# Altium PCB PCB_FVT_TESTER.PcbDoc
Units mil, origin at the board's own origin, x right, y up, seen from the top; angles counter-clockwise.
Board outline 4250 x 2500 mil, 2 copper layers (Top Layer, Bottom Layer); 45 components, 28 nets, 145 pads, 0 vias.
Unrouted connection lines stored in the file: 16.
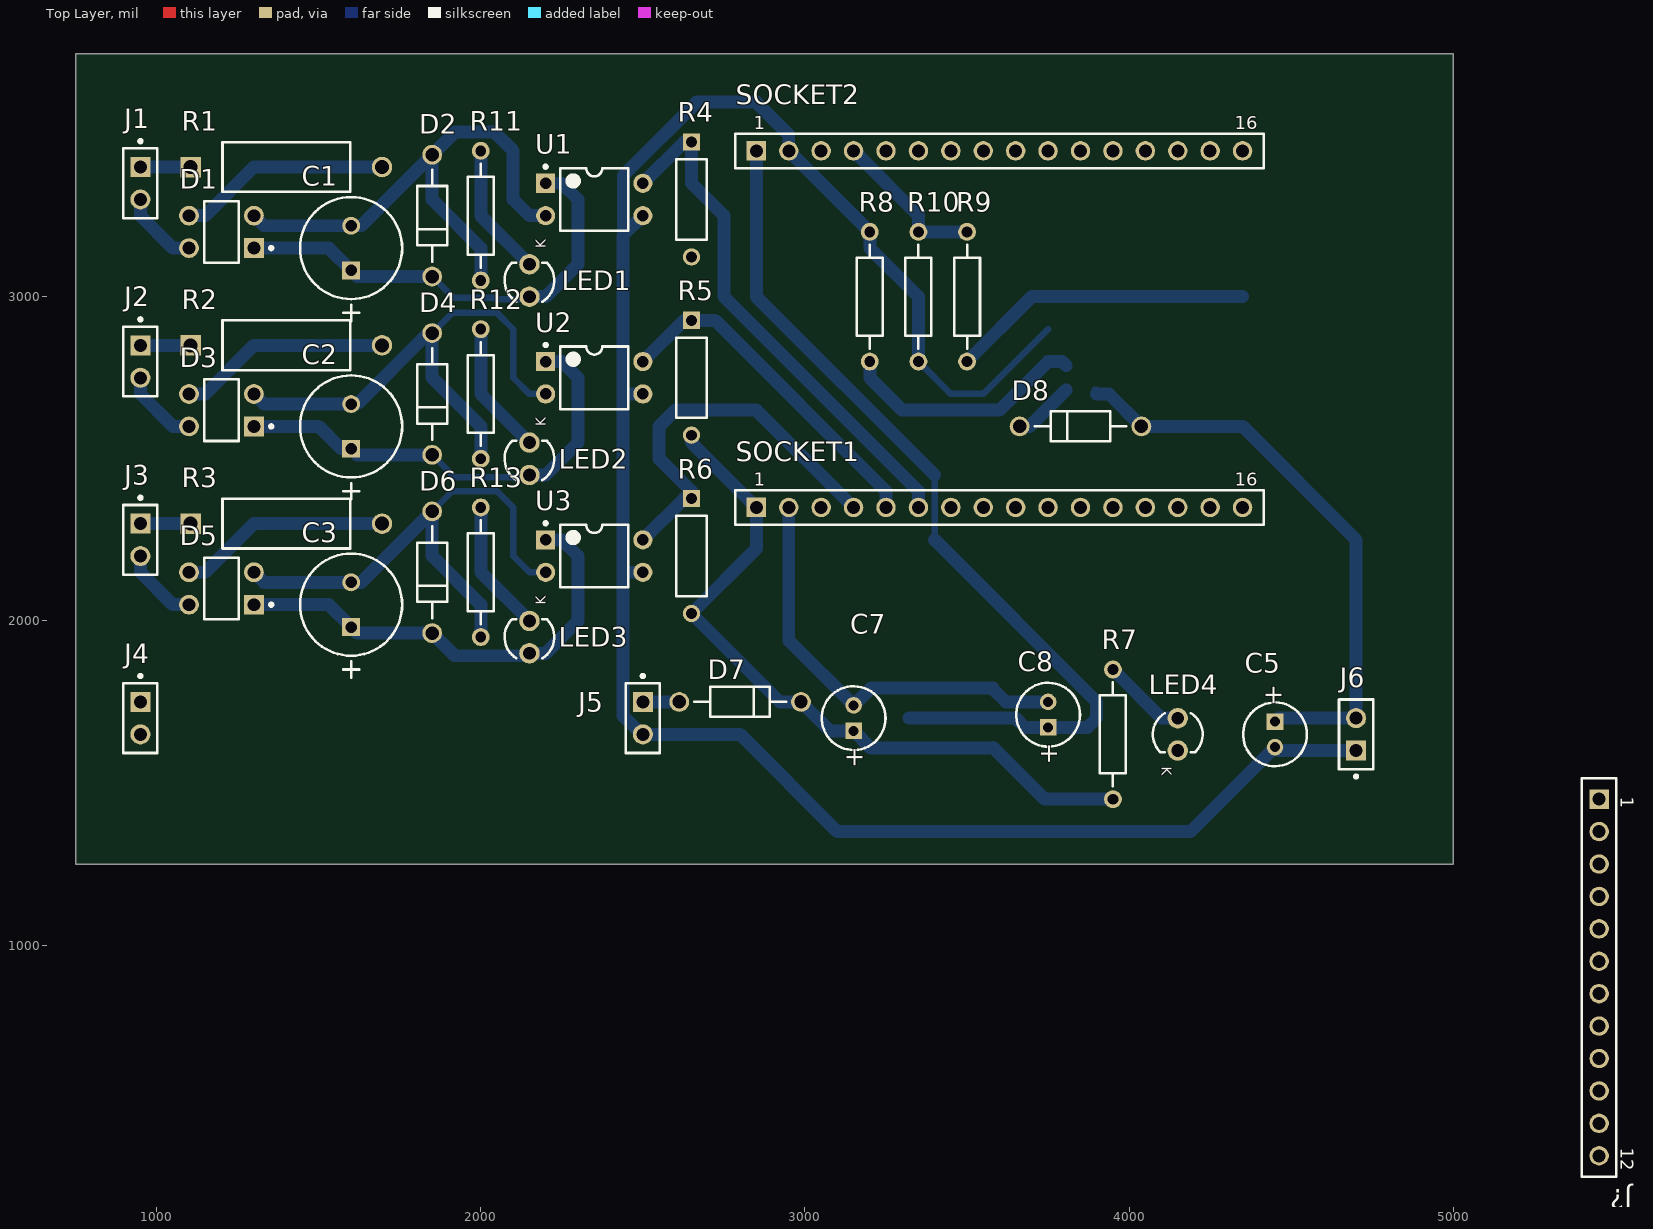
[diagram p0: Top Layer view]
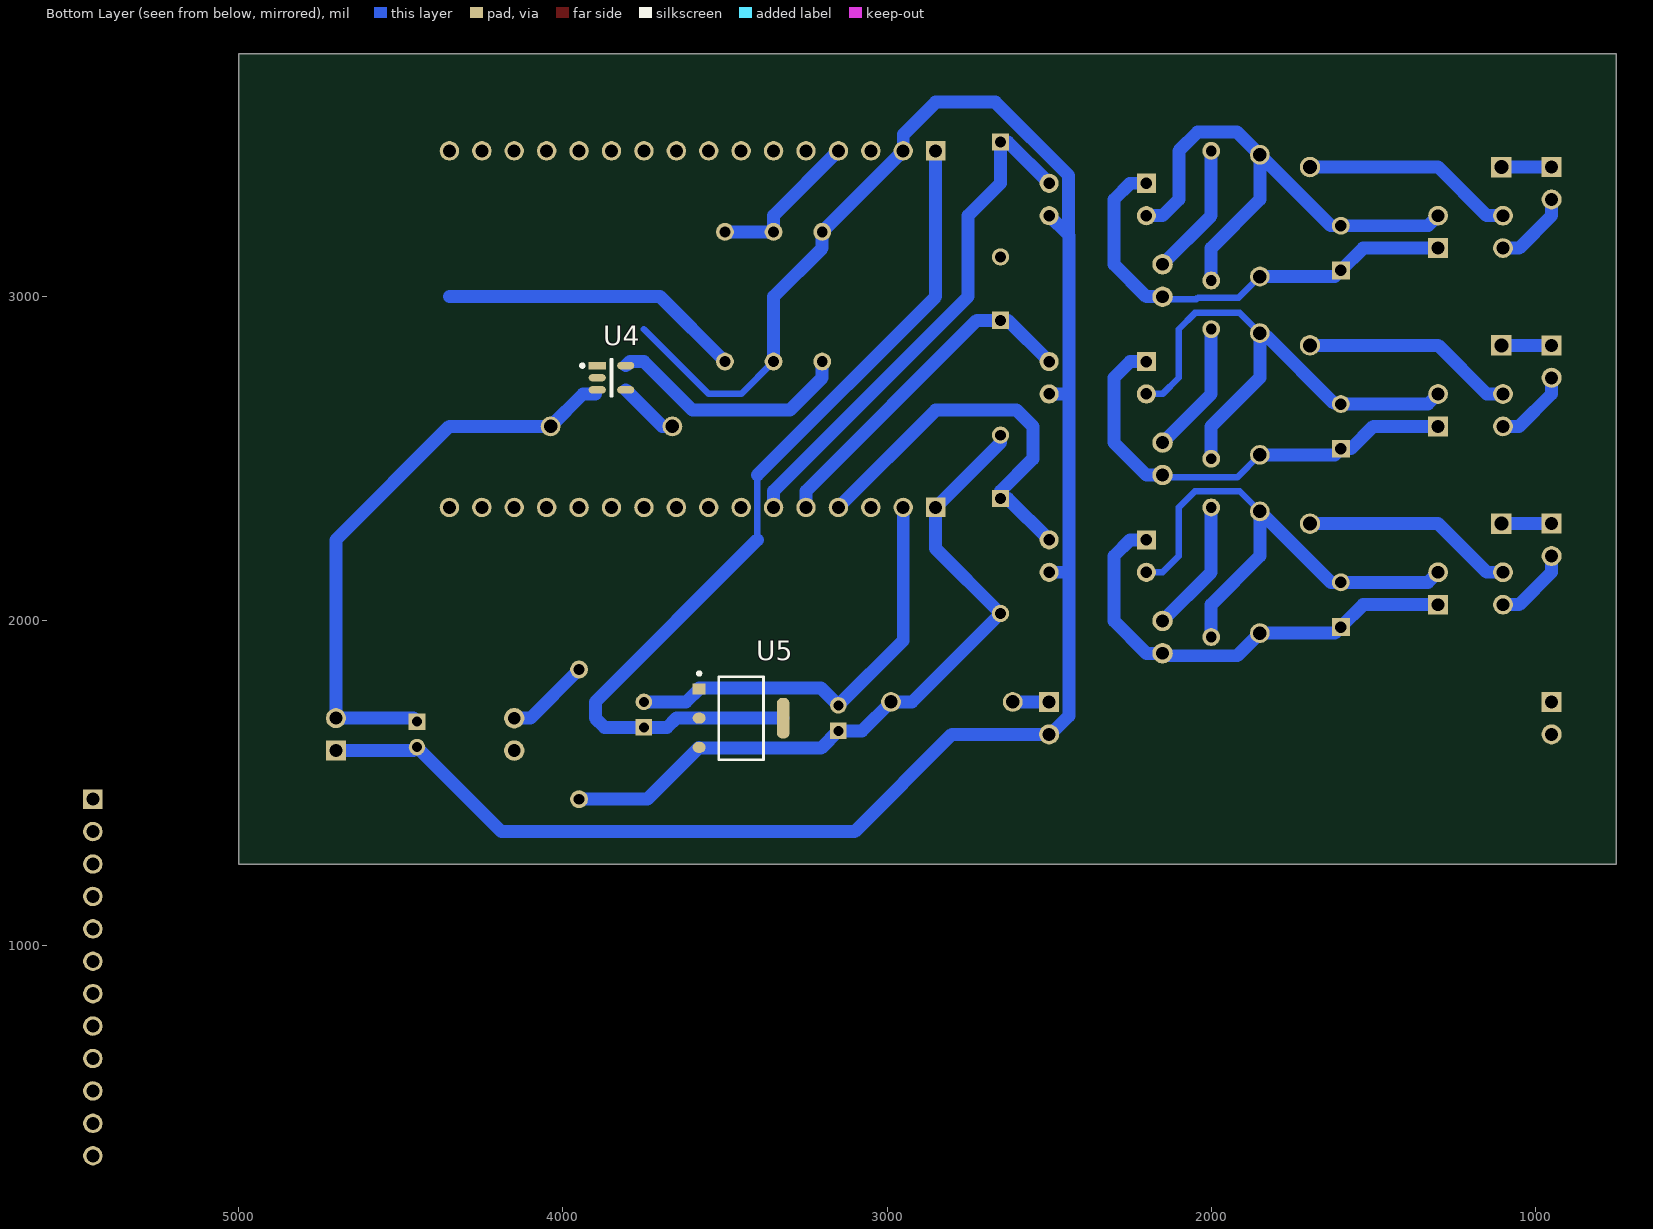
[diagram p1: Bottom Layer view, seen from below]

## Layer stack, top to bottom
Top Solder: solder mask 0.4, Solder Resist, Dk 3.5
Top Layer: signal copper 1.4
Dielectric 1: dielectric 12.6, FR-4, Dk 4.8
Bottom Layer: signal copper 1.4
Bottom Solder: solder mask 0.4, Solder Resist, Dk 3.5

## Board outline
750,1250 750,3750 5000,3750 5000,1250

## Design rules (kind name [scope] priority, off if disabled: settings)
Clearance [All] p1: gap=10 ignorepadtopadclearanceinfootprint=FALSE except(0: Arc-Hole Track-Hole SMDPad-Hole THPad-Hole Via-Hole Fill-Hole Poly-Hole Region-Hole Text-Hole)
PolygonConnect [All] p1: connectstyle=Relief reliefconductorwidth=10 reliefentries=4 polygonreliefangle="90 Angle" airgapwidth=10
RoutingVias [All] p1: holewidth=28 width=50 viastyle="Through Hole" minholewidth=28 minwidth=50 maxholewidth=28 maxwidth=50
SolderMaskExpansion [All] p1: expansion=4 istentingtop=FALSE
Width [All] p1: maxlimit=50 minlimit=10 preferedwidth=40 toplayer_maxwidth=10 toplayer_prefwidth=10 bottomlayer_minwidth=20 minimp=50.000000 maximp=50.000000 favimp=50.000000
30 further rules are at their usual default settings.

## Classes and differential pairs
component class soqueteESP32: J? SOCKET1 SOCKET2
component class "Modulo de isolação AC": C1 C2 C3 D1 D2 D3 D4 D5 D6 J1 J2 J3 J4 LED1 LED2 LED3 R1 R2 R3 R4 R5 R6 R11 R12 R13 U1 U2 U3
component class AdaptadorBateria: C5 C7 C8 D7 D8 J5 J6 LED4 R7 R8 R9 R10 U4 U5

## Components (designator, comment, footprint, x,y, rotation, side; value= is the part's Value field where it differs from the comment)
C1 "ECA1HM101" CAPPR65-350-1150X800X1250 1600,3150 r90 top
C2 "ECA1HM101" CAPPR65-350-1150X800X1250 1600,2600 r90 top
C3 "ECA1HM101" CAPPR65-350-1150X800X1250 1600,2050 r90 top
C5 "ECA1HM220" CAPPR55-200-1100X500X1200 4450,1650 r270 top
C7 "ECA1HM220" CAPPR55-200-1100X500X1200 3150,1700 r90 top
C8 "ECA1HM220" CAPPR55-200-1100X500X1200 3750,1710.63 r90 top
D1 "MB6M-E3/45" FP-MB6M-E3-45-MFG 1200,3200 r180 top
D2 "1N5919BG" ONSC-AXIAL_LEAD-2-59-10_P 1850,3250 r90 top
D3 "MB6M-E3/45" FP-MB6M-E3-45-MFG 1200,2650 r180 top
D4 "1N5919BG" ONSC-AXIAL_LEAD-2-59-10_P 1850,2700 r90 top
D5 "MB6M-E3/45" FP-MB6M-E3-45-MFG 1200,2100 r180 top
D6 "1N5919BG" ONSC-AXIAL_LEAD-2-59-10_P 1850,2150 r90 top
D7 "1N5819RLG" ONSC-AXIAL_LEAD-2-59-10_P 2800,1750 r180 top
D8 "1N5819RLG" ONSC-AXIAL_LEAD-2-59-10_P 3850,2600 r0 top
J1 "TSW-102-07-G-S" FP-TSW-102-07-G-S-MFG 950,3350 r270 top
J2 "TSW-102-07-G-S" FP-TSW-102-07-G-S-MFG 950,2800 r270 top
J3 "TSW-102-07-G-S" FP-TSW-102-07-G-S-MFG 950,2250 r270 top
J4 "TSW-102-07-G-S" FP-TSW-102-07-G-S-MFG 950,1700 r270 top
J5 "TSW-102-07-G-S" FP-TSW-102-07-G-S-MFG 2500,1700 r270 top
J6 "TSW-102-07-G-S" FP-TSW-102-07-G-S-MFG 4700,1650 r90 top
J? "61301211821" 61301211821 5450,900 r270 top
LED1 "151031VS06000" "Type 3mm" 2150,3050 r90 top
LED2 "151031VS06000" "Type 3mm" 2150,2500 r90 top
LED3 "151031VS06000" "Type 3mm" 2150,1950 r90 top
LED4 "151031VS06000" "Type 3mm" 4150,1650 r270 top
R1 "PR02000206202JA100" VISH-A1-2_V2 1400,3400 r0 top
R2 "PR02000206202JA100" VISH-A1-2_V2 1400,2850 r0 top
R3 "PR02000206202JA100" VISH-A1-2_V2 1400,2300 r0 top
R4 "MFR-25FBF52-47K5" RESA60-630X240 2650,3300 r270 top
R5 "MFR-25FBF52-47K5" RESA60-630X240 2650,2750 r270 top
R6 "MFR-25FBF52-47K5" RESA60-630X240 2650,2200 r270 top
R7 "Res2" AXIAL-0.4 3950,1650 r270 top value=1K
R8 "Res2" AXIAL-0.4 3200,3000 r270 top value=2K
R9 "Res2" AXIAL-0.4 3500,3000 r90 top value=2K
R10 "Res2" AXIAL-0.4 3350,3000 r270 top value=2K
R11 "Res2" AXIAL-0.4 2000,3250 r90 top value=2K
R12 "Res2" AXIAL-0.4 2000,2700 r90 top value=2K
R13 "Res2" AXIAL-0.4 2000,2150 r90 top value=2K
SOCKET1 "61301611821" 61301611821 3600,2350 r0 top (schematic designator socket1)
SOCKET2 "61301611821" 61301611821 3600,3450 r0 top (schematic designator socket2)
U1 "VO617A-3" VISH-DIP-4 2350,3300 r0 top
U2 "VO617A-3" VISH-DIP-4 2350,2750 r0 top
U3 "VO617A-3" VISH-DIP-4 2350,2200 r0 top
U4 "MCP73831T-2ACI/OT" FP-C04-091-OT-IPC_B 3850,2750 r180 bottom
U5 "AMS1117-3.3" FP-AMS1117-IPC_C 3450,1700 r180 bottom

## Footprints (in the part's own frame and the unit in brackets; to place one, negate y for a bottom-side part, rotate by r counter-clockwise, add the part's x,y. Pads: shape width x height; smd on the part's side, far side on the other; paste and mask are expansions set on the pad)
61301211821 [mm] "Socket Header, Pitch 2.54 mm, THT, Vertical, single row, 12p"
  rect 1.52x1.52 hole 1.02: 1(-13.97,0)
  round 1.52 hole 1.02: 2(-11.43,0) 3(-8.89,0) 4(-6.35,0) 5(-3.81,0) 6(-1.27,0) 7(1.27,0) 8(3.81,0) 9(6.35,0) 10(8.89,0) 11(11.43,0) 12(13.97,0)
  silkscreen extent -15.62,-1.35 15.62,1.35, body extent -15.49,-1.25 15.49,1.25, height 8.55
61301611821 [mm] "Socket Header, Pitch 2.54 mm, THT, Vertical, single row, 16p"
  rect 1.52x1.52 hole 1.02: 1(-19.05,0)
  round 1.52 hole 1.02: 2(-16.51,0) 3(-13.97,0) 4(-11.43,0) 5(-8.89,0) 6(-6.35,0) 7(-3.81,0) 8(-1.27,0) 9(1.27,0) 10(3.81,0) 11(6.35,0) 12(8.89,0) 13(11.43,0) 14(13.97,0) 15(16.51,0) 16(19.05,0)
  silkscreen extent -20.7,-1.35 20.7,1.35, body extent -20.57,-1.25 20.57,1.25, height 8.55
AXIAL-0.4 [mm] "Axial Device, Thru-Hole; 2 Leads; 0.4 in Pin Spacing"
  round 1.4 hole 0.85: 1(-5.08,0) 2(5.08,0)
  silkscreen extent -4.06,-1.02 4.06,1.02
CAPPR55-200-1100X500X1200 [mm] "THD, 2-Leads, Dia 5mm, Body Length 11mm"
  rect 1.3x1.3 hole 0.8: 1(-1,0)
  round 1.3 hole 0.8: 2(1,0)
  silkscreen extent -2.5,-2.5 2.5,2.5, body extent -2.5,-2.5 2.5,2.5, height 12
CAPPR65-350-1150X800X1250 [mm] "THD, 2-Leads, Dia 8mm, Body 11.5mm"
  rect 1.4x1.4 hole 0.9: 1(-1.75,0)
  round 1.4 hole 0.9: 2(1.75,0)
  silkscreen extent -5.71,-4 4,4, body extent -4,-4 4,4, height 12.5
FP-AMS1117-IPC_C [mm]
  rect 1.004x0.872 smd paste+0 mask+0: 1(-3.295,2.29)
  rrect100% 1.004x0.872 smd paste+0 mask+0: 2(-3.295,0) 3(-3.295,-2.29)
  rrect87% 1.004x3.182 smd paste+0 mask+0: 4(3.295,0)
  silkscreen extent -3.42,-3.25 1.75,3.62, body extent -3.53,-3.25 3.53,3.25, height 1.8
FP-C04-091-OT-IPC_B [mm]
  rect 1.338x0.578 smd paste+0 mask+0: 1(-1.116,0.95)
  rrect100% 1.338x0.578 smd paste+0 mask+0: 2(-1.116,0) 3(-1.116,-0.95) 4(1.116,-0.95) 5(1.116,0.95)
  silkscreen extent -2.41,-1.45 0.05,1.45
FP-MB6M-E3-45-MFG [mm]
  rect 1.55x1.55 hole 1 paste-1000 mask+0: 1(-2.54,1.27)
  round 1.55 hole 1 paste-1000 mask+0: 2(-2.54,-1.27) 3(2.54,-1.27) 4(2.54,1.27)
  silkscreen extent -4.03,-2.41 1.35,2.41, body extent -3.41,-2.51 3.41,2.51, height 0.25
FP-TSW-102-07-G-S-MFG [mm]
  rect 1.57x1.57 hole 1.02 paste-1000 mask+0: 1(-1.27,0)
  round 1.57 hole 1.02 paste-1000 mask+0: 2(1.27,0)
  silkscreen extent -3.42,-1.34 2.73,1.34, body extent -2.83,-1.44 2.83,1.44, height 0.25
ONSC-AXIAL_LEAD-2-59-10_P [mm] "AXIAL, 2-Leads, Diameter 2.35mm"
  round 1.55 hole 1.05: 1(-4.77,0) 2(4.77,0)
  silkscreen extent -3.6,-1.18 3.6,1.18
RESA60-630X240 [mm] "Axial Resistor, 2-Leads, Dia 2.4mm, Body Length 6.3mm"
  rect 1.35x1.35 hole 0.85: 1(-4.5,0)
  round 1.35 hole 0.85: 2(4.5,0)
  silkscreen extent -3.15,-1.2 3.15,1.2, body extent -3.15,-1.2 3.15,1.2, height 2.4
"Type 3mm" [mm] "THT, LED-3mm, 2pin- Body 4.15mm(max)"
  round 1.6 hole 1: 1(1.27,0) 2(-1.27,0)
  silkscreen extent -1.66,-1.95 1.4,1.95, body extent -1.93,-1.94 1.87,1.94, height 10.5
VISH-A1-2_V2 [mm] "Through Hole, 2-Leads, Dia 3.9mm, Body Length 10mm, Pin Spacing 15mm"
  rect 1.6x1.6 hole 1.1: 1(-7.5,0)
  round 1.6 hole 1.1: 2(7.5,0)
  silkscreen extent -5,-1.95 5,1.95, body extent -7.91,-1.95 7.92,1.95, height 3.88
VISH-DIP-4 [mm] "DIP, 4-Leads, Body 7x4.9mm, Pitch 2.54mm"
  rect 1.5x1.5 hole 0.9: 1(-3.81,1.27)
  round 1.5 hole 0.9: 2(-3.81,-1.27) 3(3.81,-1.27) 4(3.81,1.27)
  silkscreen extent -3.93,-2.45 2.65,2.69, body extent -3.95,-2.45 3.95,2.45, height 5.27

## Part data
C1 C2 C3: library part CMP-1665-00042-2, "Aluminum Electrolytic Capacitor, 100 uF, +/- 20%, 50 V, -40 to 85 degC, 2-Pin THD, RoHS, Bulk", Capacitance=100uF, Case/Package=Radial, Dielectric Material=Aluminium, Leakage Current=3uA, Manufacturer=Panasonic, Max Operating Temperature=85degC, Min Operating Temperature=-40degC, Package Description="2-Pin Radial Lead, Dia 8 mm, Height 12.5 mm", Package Quantity=200, Package Reference=CAPPR65-350-1150X800X1250, Ripple Current=250mA, Tolerance=20%, Voltage=50V, Datasheet URL=https://industrial.panasonic.com/cdbs/www-data/pdf/RDF0000/ABA0000C1218.pdf, Datasheet Version="Rev. 05, 10/2016", Diameter=8mm, Dissipation Factor=0.12%, Height=11.5mm, Height - Seated (Max)=0.492inch, Lead Diameter=0.6mm, Lead Free=LeadFree, Lead Pitch=3.5mm, Lead/Base Style=Straight, Length=11.5mm, Life (Hours)=2000Hour, Manufacturer URL=http://www.panasonic.com/, Mount=ThroughHole, Number of Pins=2, Packaging=Bulk, Polarity=Polar, Radiation Hardening=No, REACH SVHC=NoSVHC, Ripple Current (AC)=250mA, RoHSCompliant=true, Termination=Radial, Voltage Rating=50V, Voltage Rating (DC)=50V
C5 C7 C8: library part CMP-1665-00036-2, "Aluminum Electrolytic Capacitor, 22 uF, +/- 20%, 50 V, -40 to 85 degC, 2-Pin THD, RoHS, Bulk", Capacitance=22uF, Case/Package=Radial, Leakage Current=3uA, Manufacturer=Panasonic, Max Operating Temperature=85degC, Min Operating Temperature=-40degC, Package Description="2-Pin Radial Lead, Dia 5 mm, Height 12 mm", Package Quantity=200, Package Reference=CAPPR55-200-1100X500X1200, Ripple Current=100mA, Tolerance=20%, Voltage=50V, Datasheet URL=https://industrial.panasonic.com/cdbs/www-data/pdf/RDF0000/ABA0000C1218.pdf, Datasheet Version="Rev. 05, 10/2016", Diameter=5mm, Dissipation Factor=0.12%, Height=11mm, Height - Seated (Max)=0.472inch, Lead Diameter=0.5mm, Lead Pitch=2mm, Lead/Base Style=Straight, Length=11mm, Life (Hours)=2000Hour, Manufacturer URL=http://www.panasonic.com/, Mount=ThroughHole, Packaging=Bulk, Radiation Hardening=No, REACH SVHC=NoSVHC, Ripple Current (AC)=100mA, RoHSCompliant=true, Termination=Radial, Voltage Rating=50V, Voltage Rating (DC)=50V
D1 D3 D5: library part CMP-02540-000050-1, "BRIDGE RECT 1P 600V 500MA MBM", Case/Package=DIP, Forward Current=800mA, Forward Voltage=1V, Max Operating Temperature=150°C, Max Repetitive Reverse Voltage (Vrrm)=600V, Max Reverse Leakage Current=5uA, Max Surge Current=35A, Min Operating Temperature=-55°C, Package Quantity=100, Element Configuration=Single, Height=2.7mm, Length=4.83mm, Mount="Surface Mount", Number of Elements=1, Number of Pins=4, Packaging=Rail/Tube, Peak Non-Repetitive Surge Current=35A, Peak Reverse Current=5uA, Radiation Hardening=No, Reverse Recovery Time=150ns, Width=4.1mm
D2 D4 D6: library part CMP-1060-00030-1, "3 W Zener Voltage Regulator, 2-Pin Axial_Lead, Pb-Free, Bulk Box", Manufacturer="On Semiconductor", ComponentLink1Description="Manufacturer URL", ComponentLink1URL=http://www.onsemi.com/, ComponentLink2Description=Datasheet, ComponentLink2URL=http://www.onsemi.cn/pub_link/Collateral/1N5913B-D.PDF, ComponentLink3Description="Package Specification", ComponentLink3URL=http://www.onsemi.cn/pub_link/Collateral/59-10.PDF, DatasheetVersion="Rev. 5", Mounting Technology="Through Hole", PackageDescription="2-Pin, Axial Lead, Diameter 2.35 mm", PackageReference=AXIAL_LEAD-2-59-10, PackageVersion="Rev. U, 02/2005", Packing="Bulk Box", PartNumber=1N5919BG, RoHS=Pb-Free, VZ Typ (V)=5.6
D7 D8: library part CMP-1055-00037-1, "Rectifier, 2-Pin Axial_Lead, Pb-Free, Tape and Reel", Manufacturer="On Semiconductor", ComponentLink1Description="Manufacturer URL", ComponentLink1URL=http://www.onsemi.com/, ComponentLink2Description=Datasheet, ComponentLink2URL=http://www.onsemi.cn/pub_link/Collateral/1N5817-D.PDF, ComponentLink3Description="Package Specification", ComponentLink3URL=http://www.onsemi.cn/pub_link/Collateral/59-10.PDF, Configuration=Single, DatasheetVersion="Rev. 10", IFSM Max (A)=25, Mounting Technology="Through Hole", PackageDescription="2-Pin, Axial Lead, Diameter 2.35 mm", PackageReference=AXIAL_LEAD-2-59-10, PackageVersion="Rev. U, 02/2005", Packing="Tape and Reel", PartNumber=1N5819RLG, RoHS=TRUE
J1 J2 J3 J4 J5 J6: library part CMP-02766-000084-1, "CONN HEADER VERT 2POS 2.54MM", Current Rating=6.3A, Manufacturer=Samtec, Temperature="-55°C to +125°C", Temperature Range High=+125°C, Temperature Range Low=-55°C, Voltage Rating=550V, Automotive=No, Category=Conn, ComponentLink2Description=Datasheet, ComponentLink2URL=http://suddendocs.samtec.com/catalog_english/tsw_th.pdf, Conn Gender=Male, Conn Orientation=Straight, Contact Material=Gold,Nickel, Device Class L1=Connectors, Device Class L2="Headers and Wire Housings", Device Class L3=unset, Digikey Description="CONN HEADER VERT 2POS 2.54MM", Footprint Url=http://suddendocs.samtec.com/prints/tsw-xxx-xx-x-x-xx-xxx-footprint.pdf, Height=8.71mm, Lead Free=Yes, Manufacturer Part Number=TSW-102-07-G-S, Mouser Description="Conn Unshrouded Header HDR 2 POS 2.54mm Solder ST Thru-Hole Automotive Bulk", Number Of Contacts=2, Number Of Rows=1, Octopart=https://octopart.com/tsw-102-07-g-s-samtec-272197, Package=TSW-102-07-G-S, Pitch=2.54mm, RoHS=TRUE
J?: library part CMP-1502-01337-1, "THT Vertical Socket Header WR-PHD, Pitch 2.54 mm, Single Row, 12 pins", Contact Resistance=20mOhm, Manufacturer="Wurth Elektronik", Operating Temperature=-40to125degC, Rated Current=3A, Withstanding Voltage=500VAC, Working Voltage=250VAC, Datasheet URL=https://katalog.we-online.de/em/datasheet/6130xx11821.pdf, Gender=Female, Manufacturer URL=http://www.we-online.de, Mounting Technology=THT, Orientation=Vertical, Package Reference=61301211821, Packaging=Tray, Part Number=61301211821, Pin Number=12, Pitch=2.54mm, Publisher=WurthElektronik, Row Number=Single
LED1 LED2 LED3 LED4: library part CMP-1488-00004-1, "THT LED round mono-color color lens, WL-TMRC , Bright Green", Emitting color="Bright Green", Manufacturer="Wuerth Elektronik", ComponentLink1Description="Manufacturer URL", ComponentLink1URL=http://www.we-online.com, ComponentLink2Description=Datasheet, ComponentLink2URL=http://katalog.we-online.de/pbs/datasheet/7448042001.pdfhttp://katalog.we-online.de/pbs/datasheet/7448042001.pdfhttp://katalog.we-online.de/pbs/datasheet/7448042001.pdfhttp://katalog.we-online.de/pbs/datasheet/151031VS06000.pdf, PackageReference="Type 3mm", PartNumber=151031VS06000
R1 R2 R3: library part CMP-1240-00001-1, "Power Metal Film Leaded Resistor, 62 KOhm +/-5%, 2 W, 2-Pin THD, RoHS, Ammo Pack", Manufacturer="Vishay Semiconductor", Power="2 W", Resistance="62 KOhm", Temperature Coefficient="+/-250 ppm/degC", Tolerance=+/-5%, ComponentLink1Description="Manufacturer URL", ComponentLink1URL=http://www.vishay.com/, ComponentLink2Description=Datasheet, ComponentLink2URL=http://www.vishay.com/docs/28729/28729.pdf, ComponentLink3Description="Package Specification", ComponentLink3URL=http://www.vishay.com/docs/28729/28729.pdf, DatasheetVersion=Jun-13, Mounting Technology="Through Hole", PackageDescription="2-Pin Axial Lead, Body 10 x 3.9 mm", Packing="Ammo Pack", PartNumber=PR02000206202JA100, RoHS=TRUE
R4 R5 R6: library part CMP-1659-00063-1, "Axial Resistor, 47.5 KOhm, +/- 1%, 0.25 W, -55 to 155 degC, 2-Pin THD, RoHS, Bulk", Case Code (Metric)=2520, Case\Package=1008, Current Rating="1.3 A", Max Operating Temperature="125 degC", Min Operating Temperature="-55 degC", Package Quantity=3000, Tolerance=20%, ComponentLink1Description="Manufacturer URL", ComponentLink1URL=http://www.yageo.com/, ComponentLink2Description=Datasheet, ComponentLink2URL=http://www.yageo.com/documents/recent/Yageo%20LR_MFR_2013.pdf, DatasheetVersion=Apr-13, Height="1.2 mm", Length="2.5 mm", Mount="Surface Mount", PackageDescription="2-Pin Axial Lead, Dia 2.4 mm, Body Length 6.3 mm", PackageReference=MFR-25, Packaging="Tape and Reel", Radiation Hardening=No, RoHSCompliant=true, Shielding=Shielded, Width="2 mm"
R7 R8 R9 R10 R11 R12 R13: "Resistor", LatestRevisionDate=17-Jul-2002, LatestRevisionNote="Re-released for DXP Platform.", PackageDescription="Axial Device, Thru-Hole; 2 Leads; 0.4 in Pin Spacing", PackageReference=AXIAL-0.4, Published=8-Jun-2000, Publisher="Altium Limited"
SOCKET1 SOCKET2: library part CMP-1502-01343-1, "THT Vertical Socket Header WR-PHD, Pitch 2.54 mm, Single Row, 16 pins", Contact Resistance=20mOhm, Manufacturer="Wurth Elektronik", Operating Temperature=-40to125degC, Rated Current=3A, Withstanding Voltage=500VAC, Working Voltage=250VAC, Datasheet URL=https://katalog.we-online.de/em/datasheet/6130xx11821.pdf, Gender=Female, Manufacturer URL=http://www.we-online.de, Mounting Technology=THT, Orientation=Vertical, Package Reference=61301611821, Packaging=Tray, Part Number=61301611821, Pin Number=16, Pitch=2.54mm, Publisher=WurthElektronik, Row Number=Single
U1 U2 U3: library part CMP-2000-07400-1, "Optocoupler, Phototransistor Output, High Reliability, 5300 VRMS, -55 to 110 degC, 4-Pin DIP, RoHS, Tape and Reel", Manufacturer=Vishay/Semiconductor, Maximum Collector Current=50mA, Maximum Collector Emitter Saturation Voltage=400mV, Maximum Collector Emitter Voltage=80V, Maximum Current Transfer Ratio @ Current=200%, Maximum Forward Voltage=1.65V, Maximum Input Current=60mA, Maximum Power Dissipation=150mW, Maximum Reverse Voltage=6V, Minimum Forward Voltage=1V, Minimum Isolation Voltage=5000Vrms, Operating Temperature=-55to110°C, Package=4PDIP, Package Description="4-Pin Double In-line Package, Body 4.58 x 6.5 mm, Pitch 2.54 mm", Package Reference=DIP-4, Typical Forward Voltage=1.35V, Category=TransistorandPhotovoltaicOutputPhotoCouplers, Datasheet URL=http://www.vishay.com/docs/83430/vo617a.pdf, Datasheet Version="Rev. 2.5, 08/2015", Input Type=DC, Manufacturer URL=http://www.vishay.com/, Mounting Technology=ThroughHole, Number of Channels per Chip=1, Output Type=DC, Packaging=Tape&Reel, Rad Hard=No
U4: library part CMP-0133-00143-2, "IC CONTROLLR LI-ION 4.2V SOT23-5", Case/Package=SOT-23, Drain to Source Resistance=350mR, Max Charge Current=500mA, Max Input Voltage=6V, Max Operating Temperature=85°C, Max Output Voltage=4.5V, Max Power Dissipation=1.54W, Min Operating Temperature=-40°C, Min Output Voltage=4.168V, Min Supply Voltage=3.75V, Output Voltage=4.2V, Voltage Rating=4.534V, Contact Plating=Tin, Height=0.051inch, Lead Free="Lead Free", Length=0.122inch, Max Supply Voltage=6V, Mount="Surface Mount", Number of Cells=1, Number of Channels=1, Number of Outputs=1, Number of Pins=5, Output Current=500mA, Packaging="Tape and Reel", Radiation Hardening=No, REACH SVHC="No SVHC", Termination=SMD/SMT, Weight=0.00709oz, Width=0.071inch
U5: library part CMP-209535-000001-1, "LDO Voltage Regulators 1A, 3.3V", Dropout Voltage=1.1V, Manufacturer="Advanced Monolithic Systems", Max Junction Temp=+125°C, Max Power Dissipation=1.2W, Max Supply Voltage=15V, Nominal Supply Current=5mA, Output Current=1A, Output Voltage=3.3V, Package=AMS1117, Temperature="-40°C to +125°C", Temperature Range Low=-40°C, Automotive=No, Category=IC, ComponentLink2Description=Datasheet, ComponentLink2URL=http://www.advanced-monolithic.com/pdf/ds1117.pdf, Device Class L1="Integrated Circuits (ICs)", Device Class L2="Power Management ICs", Device Class L3="Voltage Regulators - Linear", Height=1.8mm, Ipc Land Pattern Name=SOT229P700X180-4, Lead Free=Yes, Manufacturer Part Number=AMS1117-3.3, Number of Outputs=1, Octopart=https://octopart.com/ams1117-3.3-advanced+monolithic+systems-25899300, Output Type=Fixed, RoHS=TRUE, Standoff Height=0.64mm, Temperature Range High=+125°C

## Nets (pads, with @x,y where several pads share a name; then routed paths per layer and width w, separated by ;. In a path a pad name is that pad's centre, name@x,y a point inside that pad or via, vN(x,y) a via of type N, cw(c..) or ccw(c..) an arc to the next point about the centre after c; other vN are vias at no path point)
GND: C5.2 C7.2 C8.2 J5.2 J6.1 R8.1 R10.2 SOCKET2.2 U1.3 U2.3 U3.3 U4.2 U5.1 | length 7764.5
  Bottom Layer w20: R10.2 3450,2700 3550,2700 3750,2900
  Bottom Layer w40: U3.3 2439.09,2150 ; U2.3 2439.09,2700 ; U1.3 2440.47,3190.47 ; 2950,2350 2950,1939.37 C7.2 3203.27,1792.64 3579.72,1792.64 U5.1 3619.88,1750 C8.2 ; R10.2 3350,3000 3200,3150 R8.1 SOCKET2.2 2950,3500 2850,3600 2665.82,3600 2440.47,3374.66 2440.47,3190.47 ; J6.1 4460.63,1600 C5.2 4189.37,1350 3100,1350 2800,1650 J5.2 2495.76,1650 2439.09,1706.67 2439.09,2150 ; 2439.09,2150 2439.09,2700 ; 2439.09,2700 2439.09,3189.09 2440.47,3190.47
IO2: R9.2 R10.1 SOCKET1.4 | length 482.8
  Bottom Layer w40: 3150,3450 3350,3250 R10.1 R9.2
NetC1_1: C1.1 D1.1 D2.1 LED1.2 U1.1 | length 1435
  Bottom Layer w20: D2.1 1914.64,2997.56 2040.41,2997.56 2045.53,2992.44 LED1.2@2150,2992.44
  Bottom Layer w40: D1.1 1531.1,3150 C1.1 1618.9,3062.2 D2.1 ; LED1.2@2150,2992.44 LED1.2 2200,3000 2300,3100 2300,3300 2250,3350 U1.1
NetC1_2: C1.2 D1.2 D2.2 R11.1 U1.2 | length 1676.9
  Bottom Layer w40: D1.2 1331.1,3218.9 C1.2 1631.1,3218.9 D2.2 ; R11.1 2000,3150 1850,3300 D2.2 ; U1.2 2150,3250 2100,3300 2100,3450 2042.44,3507.56 1919.76,3507.56 D2.2
NetC2_1: C2.1 D3.1 D4.1 LED2.2 U2.1 | length 1435
  Bottom Layer w20: D4.1 1919.76,2442.44 LED2.2@2150,2442.44
  Bottom Layer w40: D3.1 1500,2600 1568.9,2531.1 C2.1 1618.9,2512.2 D4.1 ; LED2.2@2150,2442.44 LED2.2 2200,2450 2300,2550 2300,2750 2250,2800 U2.1
NetC2_2: C2.2 D3.2 D4.2 R12.1 U2.2 | length 1670.7
  Bottom Layer w20: D4.2 1912.2,2950 2050,2950 2100,2900 2100,2750 2150,2700 U2.2
  Bottom Layer w40: D3.2 1331.1,2668.9 C2.2 1602.89,2671.79 1621.79,2671.79 1827.28,2877.28 1833.8,2877.28 1844.31,2887.8 D4.2 1850,2750 2000,2600 R12.1
NetC3_1: C3.1 D5.1 D6.1 LED3.2 U3.1 | length 1435
  Bottom Layer w40: D5.1 1531.1,2050 C3.1 1618.9,1962.2 D6.1 1919.76,1892.44 2150,1892.44 LED3.2 2200,1900 2300,2000 2300,2200 2250,2250 U3.1
NetC3_2: C3.2 D5.2 D6.2 R13.1 U3.2 | length 1670.7
  Bottom Layer w20: D6.2 1912.2,2400 2050,2400 2100,2350 2100,2200 2150,2150 U3.2
  Bottom Layer w40: D5.2 1331.1,2118.9 C3.2 1631.1,2118.9 D6.2 1850,2200 2000,2050 R13.1
NetC5_1: C5.1 D8.2 J6.2 R9.1 U4.3 | length 2741.5
  Bottom Layer w20: U4.3 3898.73,2712.6 3900,2711.33 3900,2700
  Bottom Layer w40: R9.1 3700,3000 4350,3000 ; 3900,2700 3937.8,2700 D8.2 4350,2600 4700,2250 J6.2 4460.63,1700 C5.1
NetD1_3: D1.3 R1.2 | length 657.4
  Bottom Layer w40: D1.3 1150,3250 1300,3400 R1.2
NetD1_4: D1.4 D3.4 D5.4 J1.2 J2.2 J3.2 J4.1 J4.2 | length 724.3
  Bottom Layer w40: J3.2 950,2150 1050,2050 D5.4 ; J2.2 950,2700 1050,2600 D3.4 ; J1.2 950,3250 1050,3150 D1.4
NetD3_3: D3.3 R2.2 | length 657.4
  Bottom Layer w40: D3.3 1150,2700 1300,2850 R2.2
NetD5_3: D5.3 R3.2 | length 657.4
  Bottom Layer w40: D5.3 1150,2150 1300,2300 R3.2
NetD7_2: D7.2 J5.1 | length 112.2
  Bottom Layer w40: J5.1 D7.2
NetJ1_1: J1.1 R1.1 | length 154.7
  Bottom Layer w40: J1.1 R1.1
NetJ2_1: J2.1 R2.1 | length 154.7
  Bottom Layer w40: J2.1 R2.1
NetJ3_1: J3.1 R3.1 | length 154.7
  Bottom Layer w40: J3.1 R3.1
NetLED1_1: LED1.1 R11.2 | length 412.1
  Bottom Layer w40: R11.2 2000,3250 LED1.1
NetLED2_1: LED2.1 R12.2 | length 412.1
  Bottom Layer w40: R12.2 2000,2700 LED2.1
NetLED3_1: LED3.1 R13.2 | length 412.1
  Bottom Layer w40: R13.2 2000,2150 LED3.1
NetLED4_1: LED4.1 U4.1
NetLED4_2: LED4.2 R7.1 | length 262.1
  Bottom Layer w40: R7.1 4100,1700 LED4.2
NetR8_2: R8.2 U4.5 | length 764.8
  Bottom Layer w40: R8.2 3200,2750 3300,2650 3600,2650 3750,2800 3793.46,2800 U4.5
sinal_CM: R6.1 SOCKET2.4 U3.4 | length 1211.9
  Bottom Layer w40: U3.4 2627.17,2377.17 R6.1 2650,2400 2550,2500 2550,2600 2600,2650 2850,2650 3150,2350
sinal_FM: R4.1 SOCKET2.6 U1.4 | length 1619.8
  Bottom Layer w40: U1.4 2627.17,3477.17 R4.1 2650,3350 2750,3250 2750,3000 3350,2400 3350,2350
sinal_VA: R5.1 SOCKET2.5 U2.4 | length 1071
  Bottom Layer w40: U2.4 2627.17,2927.17 R5.1 2722.83,2927.17 3250,2400 3250,2350
VDD: C7.1 D7.1 D8.1 R4.2 R5.2 R6.2 R7.2 SOCKET2.1 U4.4 U5.3 | length 2447
  Bottom Layer w40: R5.2 2650,2550 2850,2350 2850,2222.83 R6.2 2922.83,1750 D7.1 3077.17,1660.63 C7.1 3203.27,1607.36 3579.72,1607.36 U5.3 3739.57,1450 R7.2 ; D8.1 3693.46,2600 U4.4
VDD3v3: C8.1 SOCKET1.1 U5.2 U5.4 | length 2788.5
  Bottom Layer w20: 3400,2250 3400,2450
  Bottom Layer w40: 2850,3450 2850,3000 3400,2450 ; U5.4 U5.2 3650,1700 3678.74,1671.26 C8.1 3871.26,1671.26 3900,1700 3900,1750 3400,2250
pads on no net: J?.1 J?.2 J?.3 J?.4 J?.5 J?.6 J?.7 J?.8 J?.9 J?.10 J?.11 J?.12 SOCKET1.2 SOCKET1.3 SOCKET1.5 SOCKET1.6 SOCKET1.7 SOCKET1.8 SOCKET1.9 SOCKET1.10 SOCKET1.11 SOCKET1.12 SOCKET1.13 SOCKET1.14 SOCKET1.15 SOCKET1.16 SOCKET2.3 SOCKET2.7 SOCKET2.8 SOCKET2.9 SOCKET2.10 SOCKET2.11 SOCKET2.12 SOCKET2.13 SOCKET2.14 SOCKET2.15 SOCKET2.16

## Text inside footprints (layer, text, board x,y; h text height)
C5: Top Overlay "+" at 4420.98,1803.86 h59.06 r270
C7: Top Overlay "+" at 3179.02,1546.14 h59.06 r90
C8: Top Overlay "+" at 3779.02,1556.77 h59.06 r90
J?: Top Overlay "12" at 5516.93,374.8 h40 r270; Top Overlay "1" at 5516.93,1457.48 h40 r270
LED1: Top Overlay "K" at 2200,3150 h30 r90; Mechanical 15 "K" at 2200,3150 h30 r90
LED2: Top Overlay "K" at 2200,2600 h30 r90; Mechanical 15 "K" at 2200,2600 h30 r90
LED3: Top Overlay "K" at 2200,2050 h30 r90; Mechanical 15 "K" at 2200,2050 h30 r90
LED4: Top Overlay "K" at 4100,1550 h30 r270; Mechanical 15 "K" at 4100,1550 h30 r270
SOCKET1: Top Overlay "1" at 2842.52,2416.93 h40; Top Overlay "16" at 4325.2,2416.93 h40
SOCKET2: Top Overlay "1" at 2842.52,3516.93 h40; Top Overlay "16" at 4325.2,3516.93 h40